# EAGLE board electronic_eye1 (EAGLE 6.5.0)
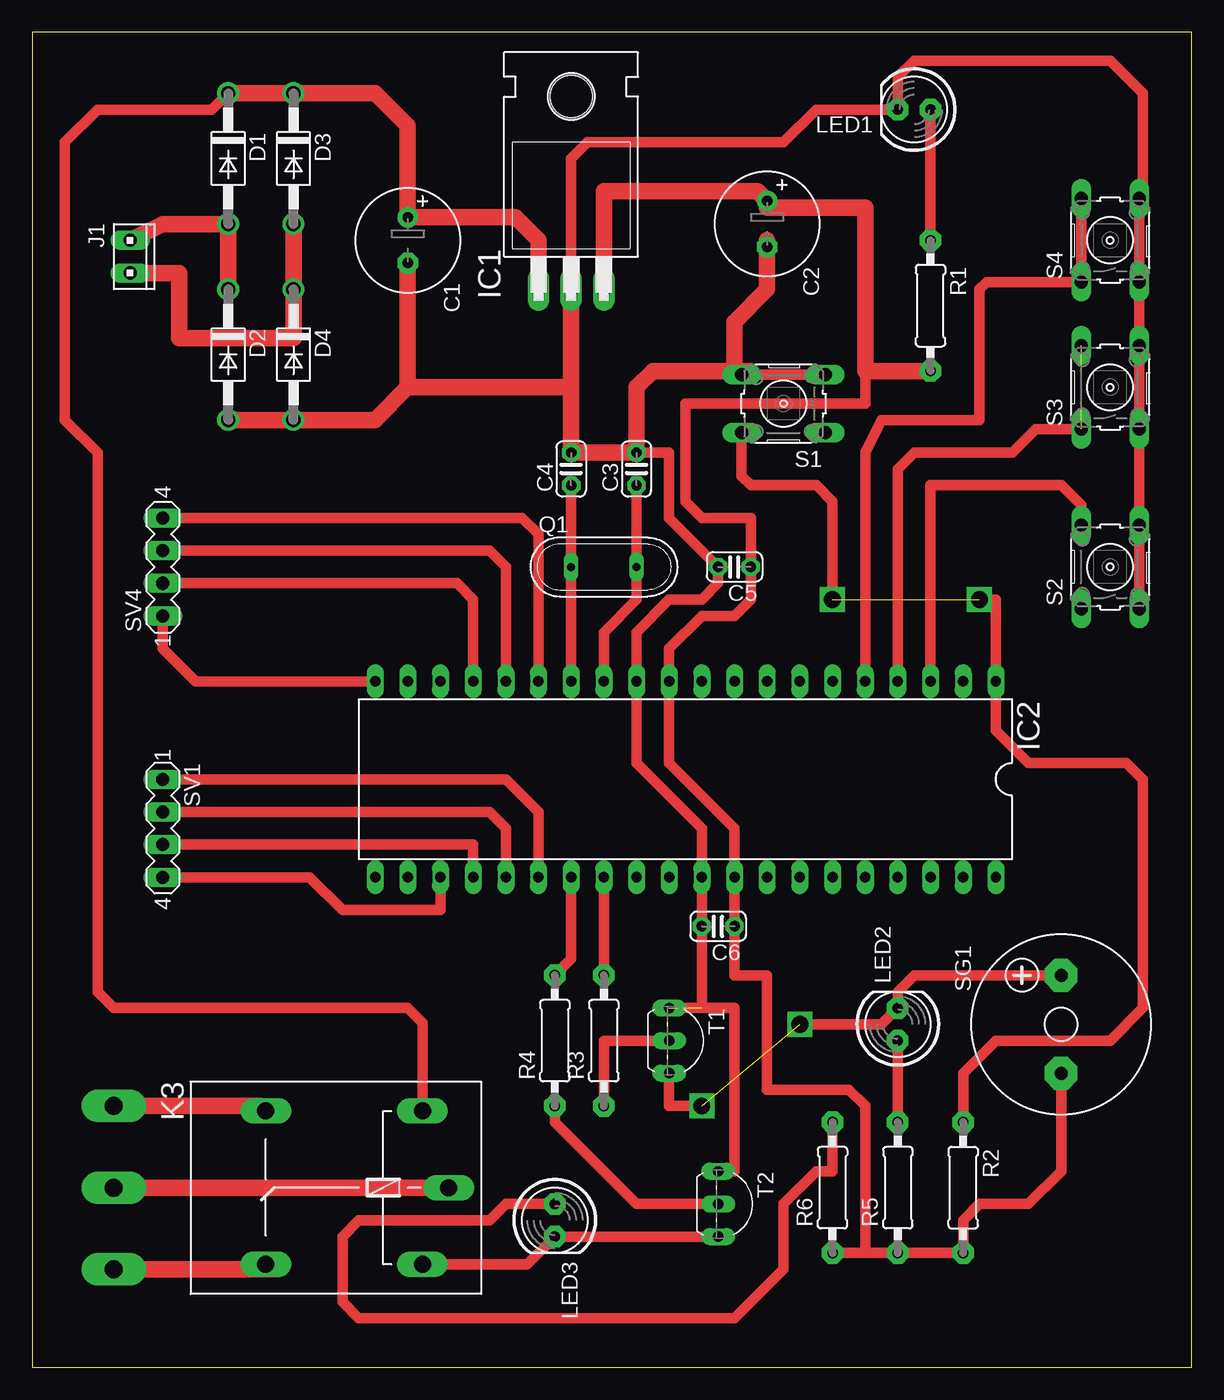
[diagram p0: board, top side]

Size 90.15 x 103.81 mm. Coordinates in mm from the lower left corner, seen from the top.
Outline: 0,0 90.15,0 90.15,103.81 0,103.81 0,0
Copper layers (1*16): Top 0.035mm / dielectric 1.5mm / Bottom 0.035mm
Design rules "default": minimum track width 10mil, minimum drill 24mil, track to track 8mil, track to pad 8mil, pad to pad 8mil, via to via 8mil, smd to smd 8mil, copper to edge 40mil, drill to drill 8mil, minimum pad ring 10mil, minimum via ring 8mil, stop-mask expansion 4mil, vias tented up to drill 0mil, thermal gap 10mil

## Footprints (pad centres in the part's own frame; a part is rotated, then mirrored left to right if it is on the bottom)
E3,5-8 = drill 0.813 pad 1.6: + -1.778,0 | drill 0.813 pad 1.6 octagon: - 1.778,0
C025-024X044 = drill 0.813 pad 1.422 octagon: 1 -1.27,0; 2 1.27,0
DO41-10 = drill 1.118: A 5.08,0; C -5.08,0
TO220H = drill 1.118 long: 1 -2.54,-10.16; 2 0,-10.16; 3 2.54,-10.16 | hole 3.302: 0,4.826
DIL40 = drill 0.813 long: 1 -24.13,-7.62; 2 -21.59,-7.62; 3 -19.05,-7.62; 4 -16.51,-7.62; 5 -13.97,-7.62; 6 -11.43,-7.62; 7 -8.89,-7.62; 8 -6.35,-7.62; 9 -3.81,-7.62; 10 -1.27,-7.62; 11 1.27,-7.62; 12 3.81,-7.62; 13 6.35,-7.62; 14 8.89,-7.62; 15 11.43,-7.62; 16 13.97,-7.62; 17 16.51,-7.62; 18 19.05,-7.62; 19 21.59,-7.62; 20 24.13,-7.62; 21 24.13,7.62; 22 21.59,7.62; 23 19.05,7.62; 24 16.51,7.62; 25 13.97,7.62; 26 11.43,7.62; 27 8.89,7.62; 28 6.35,7.62; 29 3.81,7.62; 30 1.27,7.62; 31 -1.27,7.62; 32 -3.81,7.62; 33 -6.35,7.62; 34 -8.89,7.62; 35 -11.43,7.62; 36 -13.97,7.62; 37 -16.51,7.62; 38 -19.05,7.62; 39 -21.59,7.62; 40 -24.13,7.62
10X02MTA = drill 1.016 long: 1 1.27,0; 2 -1.27,0
1X1-BIGPOGO = drill 1.4 pad 2.54 long: P$1 0,0
G5LE = drill 1.321 long: 1 -7.493,-5.969; 2 -7.493,5.969; O 4.699,5.969; P -9.525,0; S 4.699,-5.969
LED5MM = drill 0.813 pad 1.676 octagon: A -1.27,0; K 1.27,0
QS = drill 0.61 long: 1 -2.54,0; 2 2.54,0
0207/10 = drill 0.813 pad 1.676 octagon: 1 -5.08,0; 2 5.08,0
B3F-10XX = drill 1.016 long: 1 -3.251,2.261; 2 3.251,2.261; 3 -3.251,-2.261; 4 3.251,-2.261
F/CM12P = drill 1.016 pad 2.54 octagon: + 3.81,0; - -3.81,0
MA04-1 = drill 1.016 long: 1 -3.81,0; 2 -1.27,0; 3 1.27,0; 4 3.81,0
TO92-EBC-OVAL = drill 0.813 long: B 0,-1.27; C 2.54,-1.27; E -2.54,-1.27

## Placement (x,y rotation side)
C1  [E3,5-8]  29.21,87.63 270 top
C2  [E3,5-8]  57.15,88.9 270 top
C3  [C025-024X044]  46.99,69.85 90 top
C4  [C025-024X044]  41.91,69.85 90 top
C5  [C025-024X044]  54.61,62.23 180 top
C6  [C025-024X044]  53.34,34.29 180 top
D1  1N4004  [DO41-10]  15.24,93.98 270 top
D2  1N4004  [DO41-10]  15.24,78.74 270 top
D3  1N4004  [DO41-10]  20.32,93.98 270 top
D4  1N4004  [DO41-10]  20.32,78.74 270 top
IC1  7805T  [TO220H]  41.91,93.98 0 top
IC2  PIC18F4550_40  [DIL40]  50.8,45.72 180 top
J1  [10X02MTA]  7.62,86.36 270 top
JP2  [1X1-BIGPOGO]  6.35,7.62 180 top
JP3  [1X1-BIGPOGO]  6.35,20.32 180 top
JP4  [1X1-BIGPOGO]  6.35,13.97 180 top
K3  G5L  [G5LE]  22.86,13.97 180 top
LED1  [LED5MM]  68.58,97.79 180 top
LED2  [LED5MM]  67.31,26.67 90 top
LED3  [LED5MM]  40.64,11.43 270 top
Q1  [QS]  44.45,62.23 0 top
R1  [0207/10]  69.85,82.55 270 top
R2  10k  [0207/10]  72.39,13.97 270 top
R3  10k  [0207/10]  44.45,25.4 90 top
R4  10k  [0207/10]  40.64,25.4 90 top
R5  10k  [0207/10]  67.31,13.97 90 top
R6  10k  [0207/10]  62.23,13.97 90 top
S1  [B3F-10XX]  58.42,74.93 180 top
S2  [B3F-10XX]  83.82,62.23 90 top
S3  [B3F-10XX]  83.82,76.2 90 top
S4  [B3F-10XX]  83.82,87.63 90 top
SG1  F/CM12P  [F/CM12P]  80.01,26.67 90 top
SV1  [MA04-1]  10.16,41.91 270 top
SV4  [MA04-1]  10.16,62.23 90 top
T1  2N2222  [TO92-EBC-OVAL]  50.8,25.4 270 top
T2  2N2222  [TO92-EBC-OVAL]  54.61,12.7 270 top

## Library data of the parts
C1-C6 IC1 JP2-JP4 LED1-LED3 R1-R6 T1 T2 = adafruit
D1-D4 = diode
IC2 = microchip; MF: MICROCHIP; MPN: PIC18F4550-I/P; OC_FARNELL: 9321357; OC_NEWARK: 74K8623
J1 = con-amp
K3 = relay; OC_FARNELL: unknown; OC_NEWARK: unknown
Q1 = special
S1-S4 = switch-omron; MPN: B3F-1000; OC_FARNELL: 176432; OC_NEWARK: 36M3542
SG1 = buzzer; OC_FARNELL: unknown; OC_NEWARK: unknown
SV1 SV4 = con-lstb; OC_FARNELL: unknown; OC_NEWARK: unknown

## Nets
+5V: C2.+ C5.1 C6.1 IC1.3 IC2.11 IC2.32 R1.2 R2.2 R5.1 R6.1 SG1.-
+12V: C1.+ D1.C D3.C IC1.1 K3.1
GND: C1.- C2.- C3.2 C4.2 C5.2 C6.2 D2.A D4.A IC1.2 IC2.12 IC2.31 LED1.K S1.3 S1.4 S2.3 S2.4 S3.3 S3.4 S4.3 S4.4 T1.E T2.E
N$1: IC2.3 S2.2
N$2: D1.A D2.C J1.2
N$3: D3.A D4.C J1.1
N$4: C4.1 IC2.14 Q1.1
N$5: C3.1 IC2.13 Q1.2
N$6: LED1.A R1.1
N$7: LED2.A R5.2
N$9: IC2.15 SV4.4
N$10: R3.1 T1.B
N$11: IC2.1 R2.1 S1.2
N$12: R4.1 T2.B
N$15: LED2.K SG1.+ T1.C
N$16: K3.2 LED3.K T2.C
N$17: LED3.A R6.2
N$18: JP4.P$1 K3.P
N$19: JP2.P$1 K3.O
N$20: JP3.P$1 K3.S
N$21: IC2.16 SV4.3
N$22: IC2.25 SV1.2
N$23: IC2.26 SV1.1
N$24: IC2.17 SV4.2
N$25: IC2.20 SV4.1
N$31: IC2.4 S3.1 S3.2
N$32: IC2.5 S4.1 S4.2
N$38: IC2.23 SV1.4
N$39: IC2.27 R4.2
N$40: IC2.28 R3.2
N$41: IC2.24 SV1.3

## Tracks (layer width: path | path; a pad name or v marks a point on that pad's centre or on a via)
+5V
  Top 0.813: 64.77,77.47 64.77,74.93 50.8,74.93 50.8,67.31 52.07,66.04 55.88,66.04 C5.1 55.88,59.69 54.61,58.42 52.07,58.42 49.53,55.88 IC2.11 49.53,46.99 54.61,41.91 IC2.32 C6.1 54.61,30.48 57.15,30.48 57.15,21.59 63.5,21.59 64.77,20.32 64.77,8.89 | R6.1 64.77,8.89 | 64.77,8.89 R2.2 | R5.1 R2.2 | SG1.- 80.01,15.24 77.47,12.7 73.66,12.7 72.39,11.43 R2.2
  Top 1.27: IC1.3 44.45,91.44 56.39,91.44 C2.+ 57.15,90.17 64.77,90.17 64.77,77.47 R1.2
+12V
  Top 0.813: K3.1 30.35,26.8 29.21,27.94 6.35,27.94 5.08,29.21 5.08,71.12 2.54,73.66 2.54,95.25 5.08,97.79 13.97,97.79 D1.C
  Top 1.27: D1.C D3.C 26.67,99.06 29.21,96.52 C1.+ 37.59,89.41 39.37,87.63 IC1.1
GND  (1 unrouted)
  Top 0.813: C2.- 57.15,86.36 | 54.61,81.28 54.61,77.75 S1.4 | 54.61,77.47 54.89,77.47 S1.4 | S1.4 S1.3 | S1.3 61.95,77.19 62.23,77.47 61.95,77.47 S1.3 | IC1.2 41.91,93.98 43.18,95.25 58.42,95.25 60.96,97.79 LED1.K 67.31,100.33 68.58,101.6 83.82,101.6 86.36,99.06 86.36,91.16 S4.4 S4.3 | S4.3 86.08,84.1 86.36,83.82 86.36,84.1 S4.3 | S4.3 S3.4 S3.3 S2.4 | S2.4 86.08,65.05 86.36,64.77 | S2.4 S2.3 | C3.2 49.53,71.12 49.53,66.04 C5.2 53.34,60.96 52.07,59.69 49.53,59.69 46.99,57.15 IC2.12 46.99,46.99 52.07,41.91 IC2.31 C6.2 52.07,27.94 | T1.E 54.61,27.94 54.61,15.24 T2.E
  Top 1.27: D2.A D4.A 26.67,73.66 29.21,76.2 | C1.- 29.21,76.2 | 29.21,76.2 41.91,76.2 | 41.91,76.2 IC1.2 | 41.91,76.2 C4.2 C3.2 46.99,76.2 48.26,77.47 54.61,77.47 | 55.88,77.47 54.61,77.47 | 54.61,77.47 54.61,81.28 57.15,83.82 57.15,86.36 57.15,87.63
N$1
  Top 0.813: S2.2 81.56,67.03 80.01,68.58 69.85,68.58 IC2.3
N$2
  Top 1.27: J1.2 10.16,88.9 D1.A D2.C
N$3
  Top 1.27: J1.1 11.43,85.09 11.43,80.01 20.32,80.01 D4.C D3.A
N$4
  Top 0.813: C4.1 Q1.1 IC2.14
N$5
  Top 0.813: C3.1 Q1.2 46.99,59.69 44.45,57.15 IC2.13
N$6
  Top 0.813: LED1.A R1.1
N$7
  Top 0.813: LED2.A R5.2
N$9
  Top 0.813: SV4.4 38.1,66.04 39.37,64.77 IC2.15
N$10
  Top 0.813: R3.1 44.45,25.4 T1.B
N$11  (via drill 1.3)  (1 unrouted)
  Top 0.813: R2.1 72.39,22.86 74.93,25.4 83.82,25.4 86.36,27.94 86.36,45.72 85.09,46.99 77.47,46.99 74.93,49.53 IC2.1 74.93,59.69 v73.66,59.69 | S1.2 55.17,69.29 55.88,68.58 60.96,68.58 62.23,67.31 v62.23,59.69
N$12
  Top 0.813: R4.1 40.64,19.05 46.99,12.7 T2.B
N$15  (via drill 1.3)  (1 unrouted)
  Top 0.813: SG1.+ 68.58,30.48 67.31,29.21 LED2.K 66.04,26.67 v59.69,26.67 | T1.C 49.53,20.32 v52.07,20.32
N$16
  Top 0.813: K3.2 38.48,8 LED3.K T2.C
N$17
  Top 0.813: LED3.A 36.83,12.7 35.56,11.43 25.4,11.43 24.13,10.16 24.13,5.08 25.4,3.81 54.61,3.81 58.42,7.62 58.42,12.7 60.96,15.24 62.23,15.24 R6.2
N$18
  Top 1.27: JP4.P$1 K3.P 33.02,13.97
N$19
  Top 1.27: JP2.P$1 18.54,7.62 | 19.05,7.62 18.54,7.62 | 18.54,7.62 K3.O
N$20
  Top 1.27: JP3.P$1 17.78,20.32 K3.S
N$21
  Top 0.813: SV4.3 35.56,63.5 36.83,62.23 IC2.16
N$22
  Top 0.813: SV1.2 35.56,43.18 36.83,41.91 IC2.25
N$23
  Top 0.813: SV1.1 36.83,45.72 39.37,43.18 IC2.26
N$24
  Top 0.813: SV4.2 33.02,60.96 34.29,59.69 IC2.17
N$25
  Top 0.813: SV4.1 10.16,55.88 12.7,53.34 IC2.20
N$31  (1 unrouted)
  Top 0.813: S3.1 78.03,72.95 76.2,71.12 68.58,71.12 67.31,69.85 IC2.4
N$32
  Top 0.813: S4.2 S4.1 74.22,84.38 73.66,83.82 73.66,73.66 66.04,73.66 64.77,71.12 IC2.5
N$38
  Top 0.813: SV1.4 21.59,38.1 24.13,35.56 31.75,35.56 IC2.23
N$39
  Top 0.813: IC2.27 41.91,31.75 R4.2
N$40
  Top 0.813: IC2.28 R3.2
N$41
  Top 0.813: SV1.3 34.29,40.64 IC2.24